# EAGLE board magnetic-rotary-encoder (EAGLE 5.07)
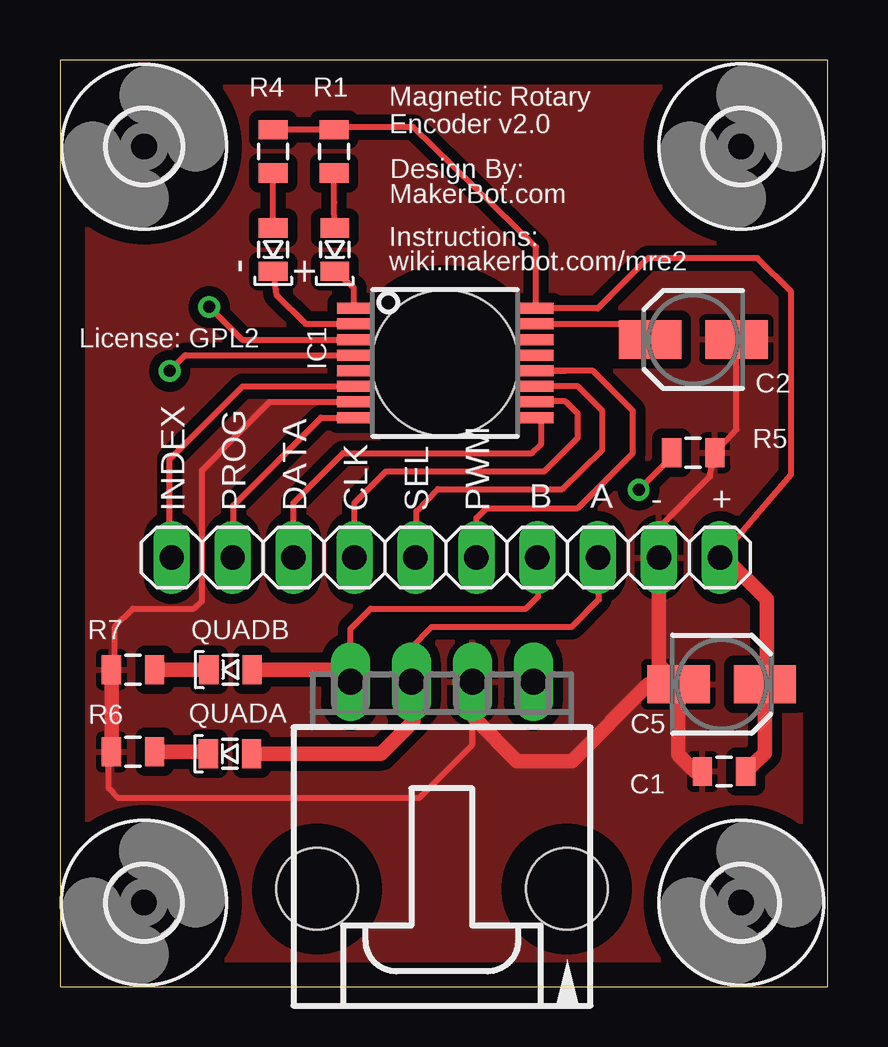
[diagram p0: board, top side]
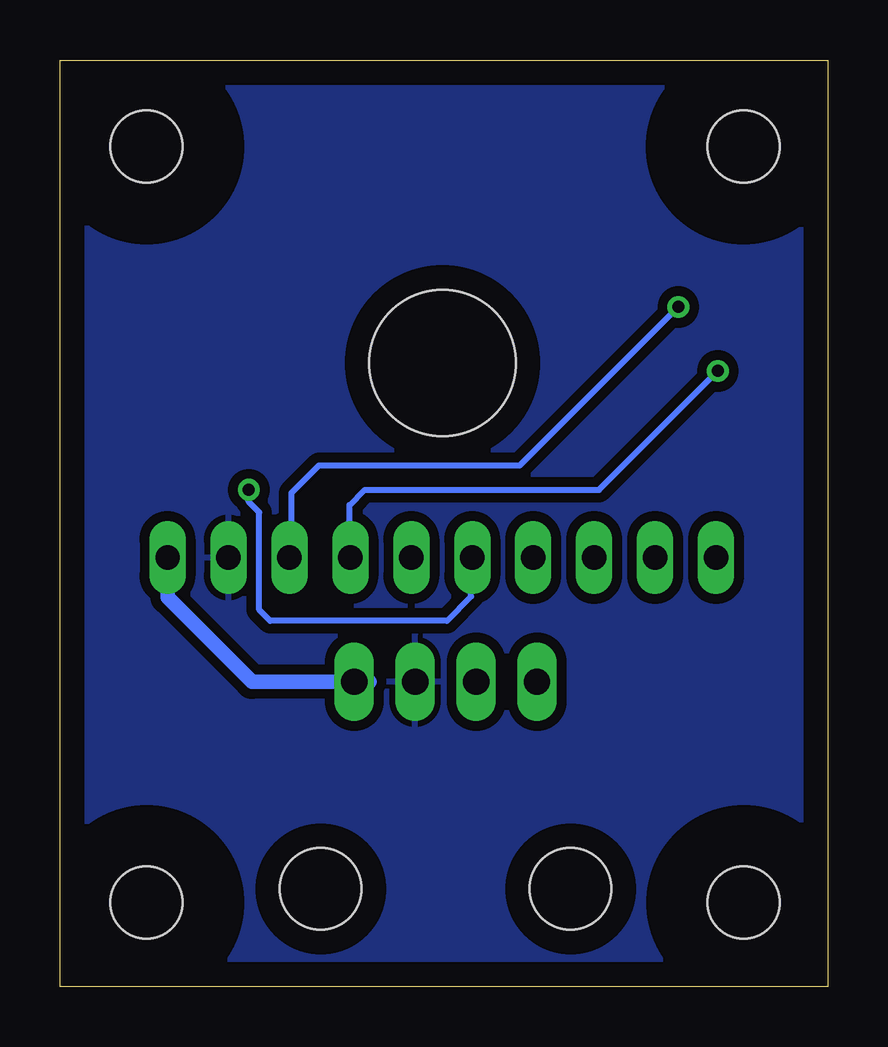
[diagram p1: board, bottom side, seen from below]

Size 32 x 38.61 mm. Coordinates in mm from the lower left corner, seen from the top.
Outline: 0,0 32,0 32,38.61 0,38.61 0,0
Copper layers (1*16): Top 0.035mm / dielectric 1.5mm / Bottom 0.035mm
Design rules "default": minimum track width 10mil, minimum drill 24mil, track to track 16mil, track to pad 16mil, pad to pad 16mil, via to via 16mil, smd to smd 8mil, copper to edge 40mil, drill to drill 8mil, minimum pad ring 10mil, minimum via ring 8mil, stop-mask expansion 4mil, vias tented up to drill 0mil, thermal gap 10mil

## Footprints (pad centres in the part's own frame; a part is rotated, then mirrored left to right if it is on the bottom)
LED-0805 = smd 1.2 x 0.8: A 0,-0.9; C 0,0.9
0805 = smd 0.8 x 1.2: 1 -0.9,0; 2 0.9,0
SANYO-OSCON_SMD_A5 = smd 2.6 x 1.6: + 1.8,0; - -1.8,0
3,0 = hole 3: 0,0
SSOP16 = smd 0.46 x 1.43: 1 -2.275,-3.795; 2 -1.625,-3.795; 3 -0.975,-3.795; 4 -0.325,-3.795; 5 0.325,-3.795; 6 0.975,-3.795; 7 1.625,-3.795; 8 2.275,-3.795; 9 2.275,3.795; 10 1.625,3.795; 11 0.975,3.795; 12 0.325,3.795; 13 -0.325,3.795; 14 -0.975,3.795; 15 -1.625,3.795; 16 -2.275,3.795
1X10 = drill 1.016 long: 1 -11.43,0; 2 -8.89,0; 3 -6.35,0; 4 -3.81,0; 5 -1.27,0; 6 1.27,0; 7 3.81,0; 8 6.35,0; 9 8.89,0; 10 11.43,0
6.1MMHOLE = hole 6.098: 0,0
70553-04 = drill 1.092 long: 1 -3.81,-7.62; 2 -1.27,-7.62; 3 1.27,-7.62; 4 3.81,-7.62 | hole 3.4: 5.207,1.016; -5.207,1.016

## Placement (x,y rotation side)
+  [LED-0805]  11.46,30.71 180 top
-  [LED-0805]  8.89,30.71 180 top
C1  100nF  [0805]  27.69,8.97 180 top
C2  1uF  [SANYO-OSCON_SMD_A5]  26.4,26.96 180 top
C5  1uF  [SANYO-OSCON_SMD_A5]  27.58,12.6 0 top
H1  MOUNT-HOLE3.0  [3,0]  28.4,35 0 top
H2  MOUNT-HOLE3.0  [3,0]  28.4,3.5 0 top
H3  MOUNT-HOLE3.0  [3,0]  3.5,3.5 0 top
H4  MOUNT-HOLE3.0  [3,0]  3.51,35 0 top
IC1  AS5040  [SSOP16]  16.05,25.98 270 top
JP1  [1X10]  16.09,17.88 180 top
QUADA  [LED-0805]  7.09,9.7 90 top
QUADB  [LED-0805]  7.11,13.21 90 top
R1  560  [0805]  11.43,34.8 90 top
R4  560  [0805]  8.89,34.8 90 top
R5  4.7K  [0805]  26.4,22.24 180 top
R6  560  [0805]  3.05,9.78 0 top
R7  560  [0805]  3.05,13.21 0 top
U$1  6.1MMHOLE  [6.1MMHOLE]  16.05,25.98 0 top
U$2  CDROM  [70553-04]  15.92,5.08 180 top

## Library data of the parts
+ - C1 QUADA QUADB R1 R4-R7 = SparkFun
C2 C5 = rcl
H1-H4 = holes
IC1 = austriamicrosystems
JP1 = pinhead
U$1 U$2 = reprap

## Nets
A: IC1.3 JP1.3 QUADA.A U$2.3
B: IC1.4 JP1.4 QUADB.A U$2.4
CLOCK: IC1.10 JP1.7
DATA: IC1.9 JP1.8
GND: C1.2 C2.- C5.- IC1.7 JP1.2 R5.1 R6.1 R7.1 U$2.2
INDEX: IC1.6 JP1.10
N$7: +.C IC1.1
N$8: C2.+ IC1.15
N$10: -.C IC1.2
N$11: +.A R1.1
N$12: -.A R4.1
N$13: QUADA.C R6.2
N$14: QUADB.C R7.2
PROG: IC1.8 JP1.9
PWM: IC1.12 JP1.5
SELECT: IC1.11 JP1.6 R5.2
VCC: C1.1 C5.+ IC1.16 JP1.1 R1.2 R4.2 U$2.1

## Tracks (layer width: path | path; a pad name or v marks a point on that pad's centre or on a via)
A  (via drill 0.5)
  Top 0.254: IC1.3 7.58,26.96 v6.22,28.32 | U$2.3 14.65,14.15 15.49,14.99 21.34,14.99 22.48,16.13 22.48,17.84 JP1.3
  Top 0.61: QUADA.A 13.39,9.7 14.73,11.05 14.73,12.63 U$2.3
  Bottom 0.254: v6.22,28.32 12.83,21.72 21.21,21.72 22.35,20.57 22.35,17.96 JP1.3
B  (via drill 0.5)
  Top 0.254: IC1.4 5.23,26.31 v4.57,25.65 | U$2.4 12.11,14.91 12.95,15.75 19.43,15.75 19.94,16.26 19.94,17.84 JP1.4
  Top 0.61: QUADB.A 11.61,13.21 U$2.4
  Bottom 0.254: v4.57,25.65 9.52,20.7 19.3,20.7 19.94,20.07 19.94,17.92 JP1.4
CLOCK
  Top 0.254: JP1.7 12.28,20.15 13.59,21.46 20.19,21.46 21.59,22.86 21.59,23.88 21.08,24.38 19.87,24.38 IC1.10
DATA
  Top 0.254: JP1.8 9.74,20.15 11.81,22.23 19.68,22.23 20.07,22.61 20.07,23.49 IC1.9
GND
  Top 0.254: R7.1 2.29,13.4 2.29,14.99 3.05,15.75 5.59,15.75 5.92,16.05 5.92,21.51 8.74,24.36 IC1.7 | C2.- 28.2,23.21 R5.1 27.1,21.26 25.15,19.3 24.89,17.96 JP1.2 | U$2.2 17.19,10.08 14.99,7.87 2.41,7.87 2.03,8.26 2.03,9.71 R6.1
  Top 0.61: JP1.2 24.98,13.41 C5.- | C1.2 26.47,8.97 25.78,9.65 C5.- | C5.- 24.54,12.6 21.34,9.4 19.05,9.4 17.27,11.18 17.27,12.63 U$2.2 | R6.1 R7.1
  pour Top: 0.13,38.61 31.88,38.61 31.88,-0.13 0.13,-0.13
  pour Bottom: 0.13,38.61 31.88,38.61 31.88,-0.13 0.13,-0.13
INDEX
  Top 0.254: IC1.6 7.61,25.01 4.57,21.97 4.57,17.96 JP1.10
N$7
  Top 0.254: IC1.1 12.26,29.11 +.C
N$8
  Top 0.254: IC1.15 24.72,27.61 C2.+
N$10
  Top 0.254: IC1.2 10.24,27.61 9.02,28.83 -.C
N$11
  Top 0.254: R1.1 11.43,32.67 +.A
N$12
  Top 0.254: -.A R4.1
N$13
  Top 0.61: R6.2 5.96,9.78 QUADA.C
N$14
  Top 0.61: R7.2 QUADB.C
PROG
  Top 0.254: IC1.8 10.88,23.71 7.24,20.07 7.24,17.92 JP1.9
PWM
  Top 0.254: 20.57,25.66 IC1.12 | 20.57,25.66 21.08,25.65 | JP1.5 17.36,19.52 17.78,19.94 21.59,19.94 23.88,22.23 23.88,24 22.23,25.65 20.58,25.65 20.57,25.66
SELECT  (via drill 0.5)
  Top 0.254: JP1.6 14.86,17.92 14.86,19.81 15.75,20.73 20.95,20.73 22.61,22.35 22.61,24 21.6,25.01 IC1.11 | R5.2 25.67,22.24 v24.13,20.7
  Bottom 0.254: v24.13,20.7 24.13,20.19 23.7,19.76 23.7,15.7 23.24,15.24 15.88,15.24 14.86,16.26 14.86,17.84 JP1.6
VCC
  Top 0.254: JP1.1 30.48,21.35 30.48,28.96 29.08,30.35 24.51,30.35 22.42,28.26 IC1.16 19.85,30.82 14.73,35.81 12,35.81 R1.2 R4.2
  Top 0.61: JP1.1 27.72,17.88 29.46,16.13 29.46,12.68 C5.+ 29.38,9.72 C1.1
  Bottom 0.61: JP1.1 27.52,16.21 24,12.7 19.1,12.7 U$2.1

## Text on the board
tPlace: Magnetic Rotary | Encoder v2.0 | Design By: | MakerBot.com | Instructions: | wiki.makerbot.com/mre2 | License: GPL2 | B | A | INDEX | PROG | DATA | CLK | SEL | PWM | - | +